# Altium PCB PCB_GTIL_WIFI.PcbDoc
Units mm, origin at the board's own origin, x right, y up, seen from the top; angles counter-clockwise.
Board outline 152.4 x 101.6 mm, 2 copper layers (Top Layer, Bottom Layer); 9 components, 13 nets, 57 pads, 2 vias.
Unrouted connection lines stored in the file: 1.
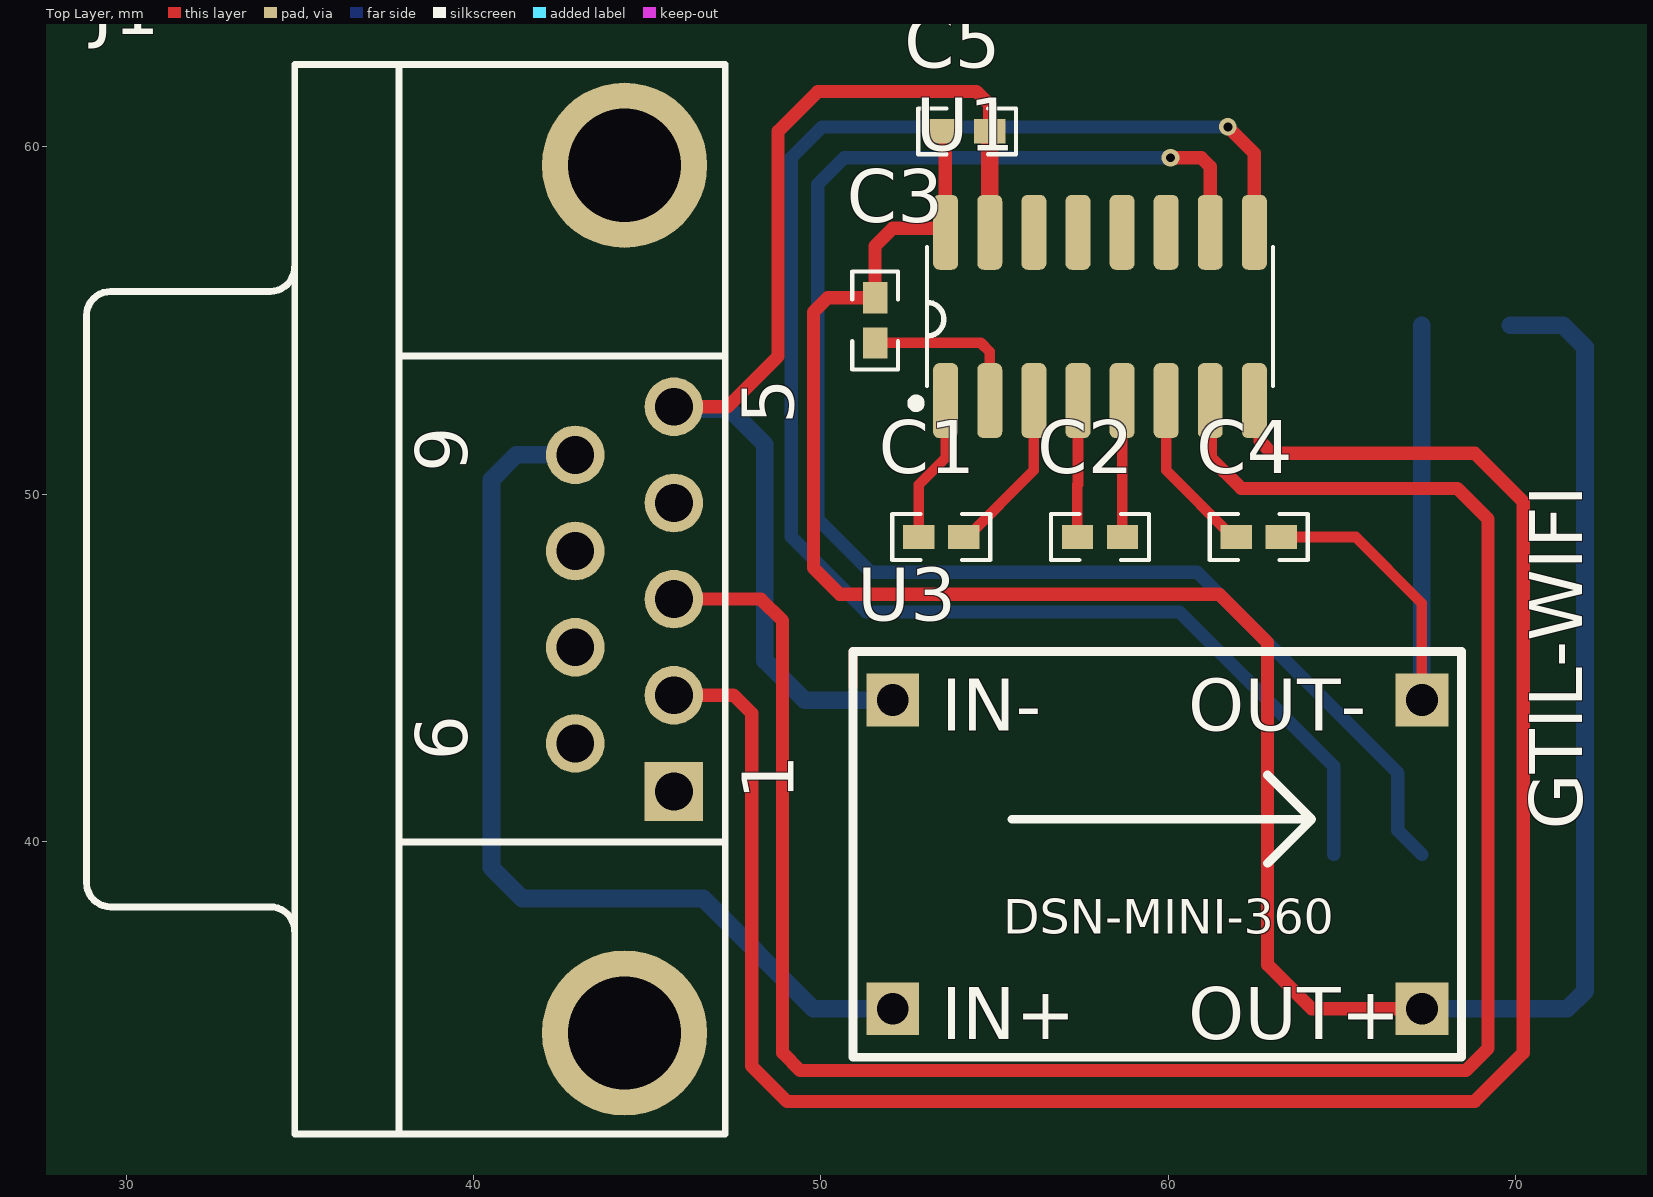
[diagram p0: Top Layer view]
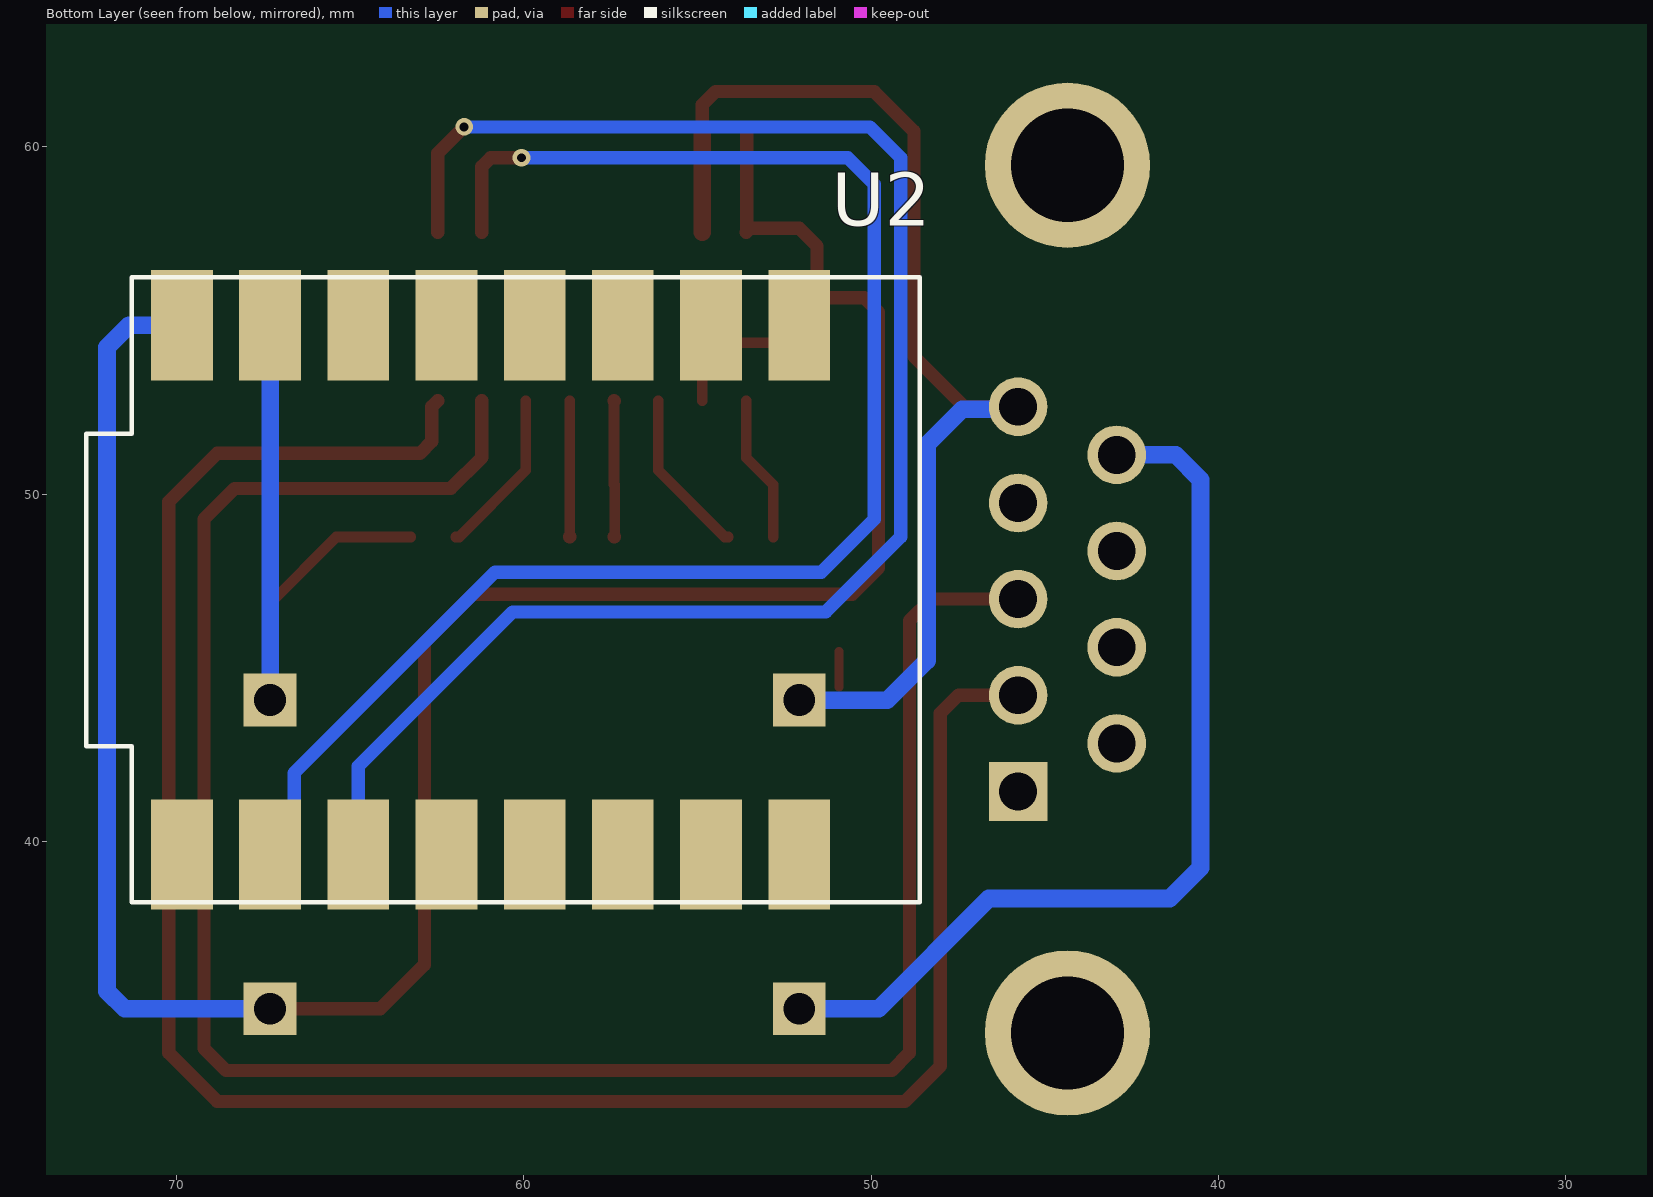
[diagram p1: Bottom Layer view, seen from below]
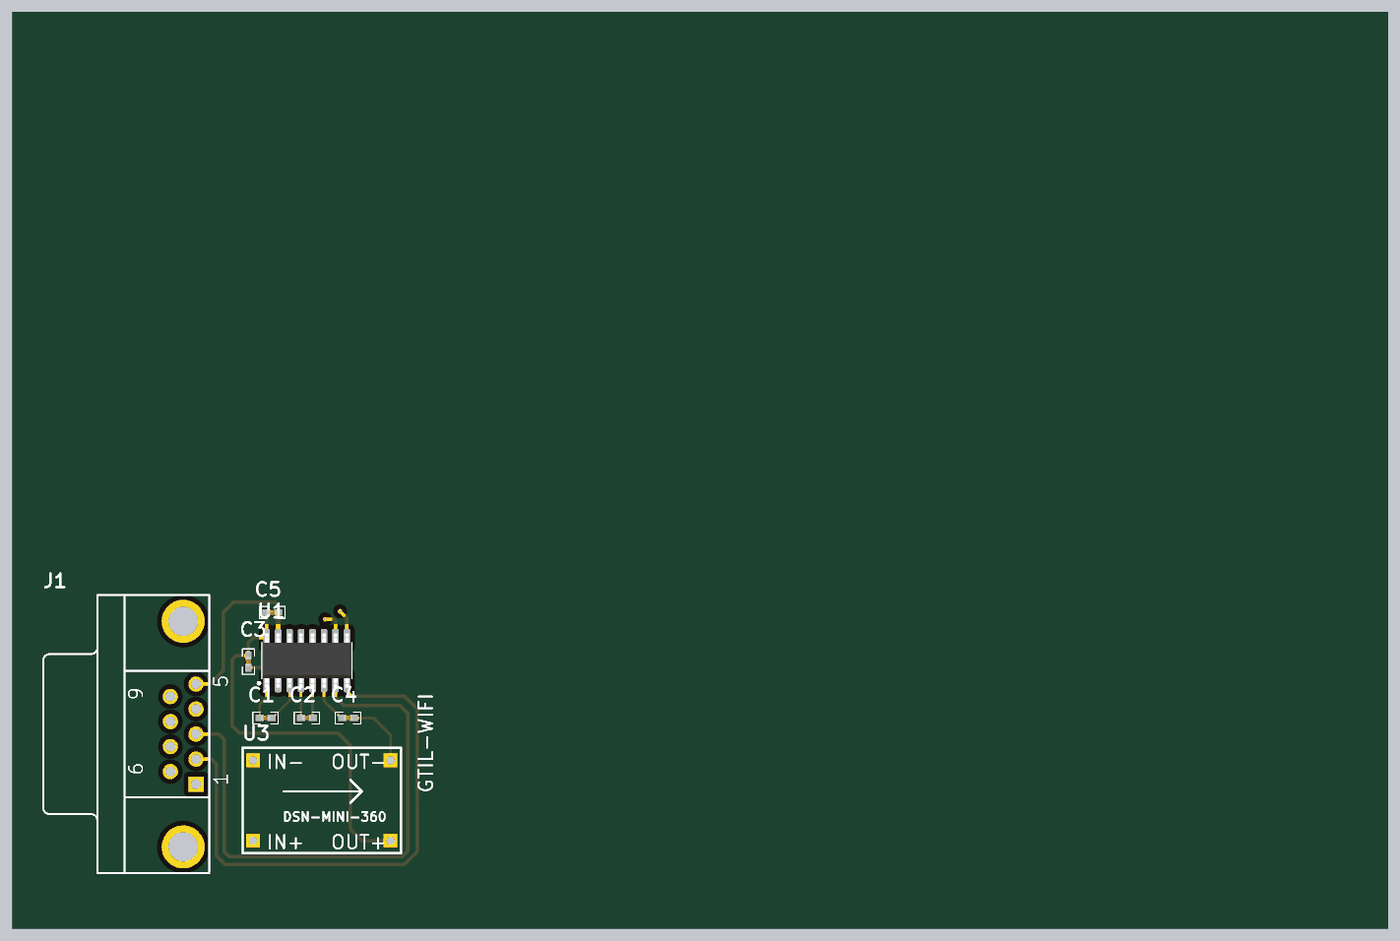
[diagram p2: 3D render of the assembled board from above, using the file's embedded part models]

## Layer stack, top to bottom
Top Solder: solder mask 0.0102, Solder Resist, Dk 3.5
Top Layer: signal copper 0.0356
Dielectric 1: dielectric 0.32, FR-4, Dk 4.8
Bottom Layer: signal copper 0.0356
Bottom Solder: solder mask 0.0102, Solder Resist, Dk 3.5

## Board outline
25.4,25.4 177.8,25.4 177.8,127 25.4,127

## Design rules (kind name [scope] priority, off if disabled: settings)
Clearance [All] p1: gap=0.254 ignorepadtopadclearanceinfootprint=FALSE except(0: Arc-Hole Track-Hole SMDPad-Hole THPad-Hole Via-Hole Fill-Hole Poly-Hole Region-Hole Text-Hole)
PlaneClearance [All] p1: clearance=0.5
PolygonConnect [All] p1: connectstyle=NoConnect reliefconductorwidth=0.254 reliefentries=4 polygonreliefangle="90 Angle" airgapwidth=0.5
RoomDefinition Schematic [InComponentClass('Schematic')] p1: confinementstyle=ConfineIn formatcopy=TRUE lockcomponents=FALSE outline 37.846,31.242 73.533,31.242 73.533,62.738 37.846,62.738
RoutingVias [All] p1: holewidth=0.711 width=0.254 viastyle="Through Hole" minholewidth=0.711 minwidth=0.254 maxholewidth=0.711 maxwidth=0.254
SolderMaskExpansion [All] p1: expansion=0.52 istentingtop=FALSE soldermaskfromhole=TRUE
Width [All] p1: maxlimit=0.635 minlimit=0.305 preferedwidth=0.508
29 further rules are at their usual default settings.

## Components (designator, comment, footprint, x,y, rotation, side; value= is the part's Value field where it differs from the comment)
C1 "100n" "CAPC-0402 (1005)" 53.467,48.768 r180 top
C2 "100n" "CAPC-0402 (1005)" 58.039,48.768 r0 top
C3 "100n" "CAPC-0402 (1005)" 51.562,55.006 r270 top
C4 "100n" "CAPC-0402 (1005)" 62.611,48.768 r0 top
C5 "100n" "CAPC-0402 (1005)" 54.214,60.452 r180 top
J1 "D Connector 9" DSUB1.385-2H9 34.846,46.978 r90 top
U1 "MAX 232" SOIC-16 58.039,55.118 r0 top
U2 "ESP32-C3_SUPERMINI" MODULE_ESP32-C3_SUPERMINI 59.95,47.244 r90 bottom
U3 "DSN-MINI" PCBComponent_1 59.69,39.624 r0 top

## Footprints (in the part's own frame and the unit in brackets; to place one, negate y for a bottom-side part, rotate by r counter-clockwise, add the part's x,y. Pads: shape width x height; smd on the part's side, far side on the other; paste and mask are expansions set on the pad)
"CAPC-0402 (1005)" [mm] "Resistor Chip, Body 1.0x0.5mm, IPC High Density"
  rect 0.9x0.7 smd mask+0.1: 1(-0.65,0) 2(0.65,0)
  silkscreen extent -1.41,-0.66 1.41,0.66, body extent -0.5,-0.25 0.5,0.25, height 0.5
DSUB1.385-2H9 [mm] "Connector; D Subminiature; 9 Position; Right Angle; Pitch 1.385 mm"
  rect 1.69x1.69 hole 1.09: 1(-5.54,-10.92)
  round 1.69 hole 1.09: 2(-2.77,-10.92) 3(0,-10.92) 4(2.77,-10.92) 5(5.54,-10.92) 6(-4.155,-8.08) 7(-1.385,-8.08) 8(1.385,-8.08) 9(4.155,-8.08)
  round 4.76 hole 3.26: 10(-12.495,-9.5) 11(12.495,-9.5)
  silkscreen extent -15.4,-12.4 15.4,6
MODULE_ESP32-C3_SUPERMINI [mm]
  rect 3.175x1.778 smd: 0(7.62,-7.88) 1(7.62,-5.34) 2(7.62,-2.8) 3(7.62,-0.26) 3.3(7.62,4.82) 4(7.62,2.28) 5(-7.62,9.9) 5V(7.62,9.9) 6(-7.62,7.36) 7(-7.62,4.82) 8(-7.62,2.28) 9(-7.62,-0.26) 10(-7.62,-2.8) 20(-7.62,-5.34) 21(-7.62,-7.88) G(7.62,7.36)
  silkscreen extent -9,-11.35 9,12.65
PCBComponent_1 [mil]
  rect 60x60 hole 36 paste+0 mask+2: 1(-300,-175) 2(-300,175) 3(300,-175) 4(300,175)
  Top Layer lines w10: -345,190 -345,230
  silkscreen extent -345,-230 345,230
SOIC-16 [mm] "Small Outline IC (SOIC), 1.27 mm pitch; 16 pin, 9.90 mm L X 4.00 mm W X 1.75 mm H body"
  rrect50% 0.72x2.16 smd: 1(-4.445,-2.425) 2(-3.175,-2.425) 3(-1.905,-2.425) 4(-0.635,-2.425) 5(0.635,-2.425) 6(1.905,-2.425) 7(3.175,-2.425) 8(4.445,-2.425) 9(4.445,2.425) 10(3.175,2.425) 11(1.905,2.425) 12(0.635,2.425) 13(-0.635,2.425) 14(-1.905,2.425) 15(-3.175,2.425) 16(-4.445,2.425)
  silkscreen extent -5.42,-2.62 4.98,2, body extent -4.95,-3 4.95,3, height 1.26

## Part data
C1 C2 C3 C4 C5: library part GRM155R71A104JA01D, "CAP CER 0.1UF 10V X7R 0402", MFR="Murata Electronics", Category=Capacitor, MPN=GRM155R71A104JA01D, Sloder=0402
J1: "Receptacle Assembly, 9 Position, Right Angle", PackageDocument=O, DatasheetDocument=1-Sep-1999, Gender=Receptacle, LatestRevisionDate=17-Jul-2002, LatestRevisionNote="Re-released for DXP Platform.", Orientation="Right Angle", PackageReference=788750, Positions=9, Published=15-Jun-2001, Publisher="Altium Limited"
U1: library part "MAX3232CDRE4, MAX3232CDR", "IC DRVR/RCVR MULTCH RS232 16SOIC", Category=IC, MPN="MAX3232CDRE4, MAX3232CDR", Solder=SMT
U2: "Super tiny ESP32-C3 board", Package=Package, Check_prices=https://www.snapeda.com/parts/ESP32-C3%20SuperMini/Espressif+Systems/view-part/?ref=eda, MF="Espressif Systems", MP="ESP32-C3 SuperMini", SnapEDA_Link=https://www.snapeda.com/parts/ESP32-C3%20SuperMini/Espressif+Systems/view-part/?ref=snap

## Via types
v1: diameter 0.508, hole 0.254, Top Layer to Bottom Layer, 2 vias

## Nets (pads, with @x,y where several pads share a name; then routed paths per layer and width w, separated by ;. In a path a pad name is that pad's centre, name@x,y a point inside that pad or via, vN(x,y) a via of type N, cw(c..) or ccw(c..) an arc to the next point about the centre after c; other vN are vias at no path point)
+5: C3.1 C5.2 U1.16 U2.5V U3.3 | length 70.1
  Top Layer w0.381: C5.2 53.579,60.437 U1.16@53.579,57.558 ; U1.16 U1.16@53.579,57.558 ; U3.3 64.135,35.179 62.865,36.449 62.865,45.72 61.468,47.117 50.546,47.117 49.784,47.879 49.784,55.245 50.195,55.656 C3.1 51.562,57.15 52.07,57.658 53.479,57.658 U1.16@53.579,57.558
  Bottom Layer w0.508: U3.3 71.501,35.179 72.009,35.687 72.009,54.229 71.374,54.864 U2.5V
+12: J1.9 U3.1 | length 27.1
  Bottom Layer w0.508: J1.9 41.227,51.133 40.513,50.419 40.513,39.243 41.402,38.354 46.609,38.354 49.784,35.179 U3.1
GND: C4.2 C5.1 J1.5 U1.15 U2.G U3.2 U3.4 | length 52.5
  Top Layer w0.305: C4.2 65.405,48.768 67.31,46.863 U3.4 U3.4@67.31,43.93
  Top Layer w0.381: J1.5 47.311,52.518 48.768,53.975 48.768,60.452 49.911,61.595 54.483,61.595 54.864,61.214 C5.1
  Top Layer w0.508: U1.15 C5.1
  Bottom Layer w0.508: J1.5 45.833,52.451 47.371,52.451 48.387,51.435 48.387,45.212 49.53,44.069 U3.2 ; U3.4 U2.G
NetC1_1: C1.1 U1.3 | length 4.8
  Top Layer w0.305: C1.1 54.217,48.768 56.134,50.685 U1.3
NetC1_2: C1.2 U1.1 | length 4.2
  Top Layer w0.305: C1.2 52.817,50.277 53.594,51.054 U1.1
NetC2_1: C2.1 U1.4 | length 4
  Top Layer w0.305: C2.1 57.389,50.277 57.404,50.292 U1.4
  Top Layer w0.381: C2.1 C2.1@57.396,48.776 ; U1.4@57.396,52.686 U1.4
NetC2_2: C2.2 U1.5 | length 3.9
  Top Layer w0.305: U1.5 58.682,52.686 C2.2@58.682,48.776
  Top Layer w0.381: C2.2@58.682,48.776 C2.2
NetC3_2: C3.2 U1.2 | length 4.8
  Top Layer w0.305: C3.2 54.61,54.356 54.864,54.102 U1.2
NetC4_1: C4.1 U1.6 | length 4.8
  Top Layer w0.305: U1.6 59.944,50.685 61.861,48.768 C4.1
RS232_RXD: J1.3 U1.7 | length 62.2
  Top Layer w0.381: J1.3 48.272,46.978 48.895,46.355 48.895,33.909 49.403,33.401 68.58,33.401 69.215,34.036 69.215,49.276 68.326,50.165 62.103,50.165 61.214,51.054 U1.7
RS232_TXD: J1.2 U1.8 | length 61.3
  Top Layer w0.381: J1.2 47.486,44.208 48.006,43.688 48.006,33.528 49.022,32.512 68.834,32.512 70.231,33.909 70.231,49.784 68.834,51.181 62.992,51.181 62.654,51.519 62.654,52.523 U1.8
TTL_RXD: U1.9 U2.7 | length 48.1
  Top Layer w0.381: v1(61.722,60.579) 62.484,59.817 U1.9
  Bottom Layer w0.381: v1(61.722,60.579) 50.038,60.579 49.149,59.69 49.149,48.768 51.308,46.609 60.325,46.609 64.77,42.164 U2.7
TTL_TXD: U1.10 U2.6 | length 45.6
  Top Layer w0.381: v1(60.071,59.69) 60.96,59.69 61.214,59.436 U1.10
  Bottom Layer w0.381: v1(60.071,59.69) 50.673,59.69 49.911,58.928 49.911,49.276 51.435,47.752 60.833,47.752 66.611,41.974 66.611,40.322 U2.6
pads on no net: J1.1 J1.4 J1.6 J1.7 J1.8 J1.10 J1.11 U1.11 U1.12 U1.13 U1.14 U2.0 U2.1 U2.2 U2.3 U2.3.3 U2.4 U2.5 U2.8 U2.9 U2.10 U2.20 U2.21

## Silkscreen, mask and mechanical layers (free items; w line width, h text height)
Top Overlay:
  text "GTIL-WIFI" at 71.933,40.335 h1.52 r90

## Text inside footprints (layer, text, board x,y; h text height)
J1: Top Overlay "6" at 39.821,42.323 h1.5 r90; Top Overlay "9" at 39.821,50.633 h1.5 r90; Top Overlay "5" at 49.221,52.018 h1.5 r90; Top Overlay "1" at 49.221,41.188 h1.5 r90
U3: Top Overlay "IN-" at 53.467,43.192 h1.5; Top Overlay "OUT-" at 60.579,43.192 h1.5; Top Overlay "DSN-MINI-360" at 55.245,37.346 h1; Top Overlay "OUT+" at 60.579,34.302 h1.5; Top Overlay "IN+" at 53.467,34.302 h1.5